# EAGLE board Mosfet2 (EAGLE 9.3.0)
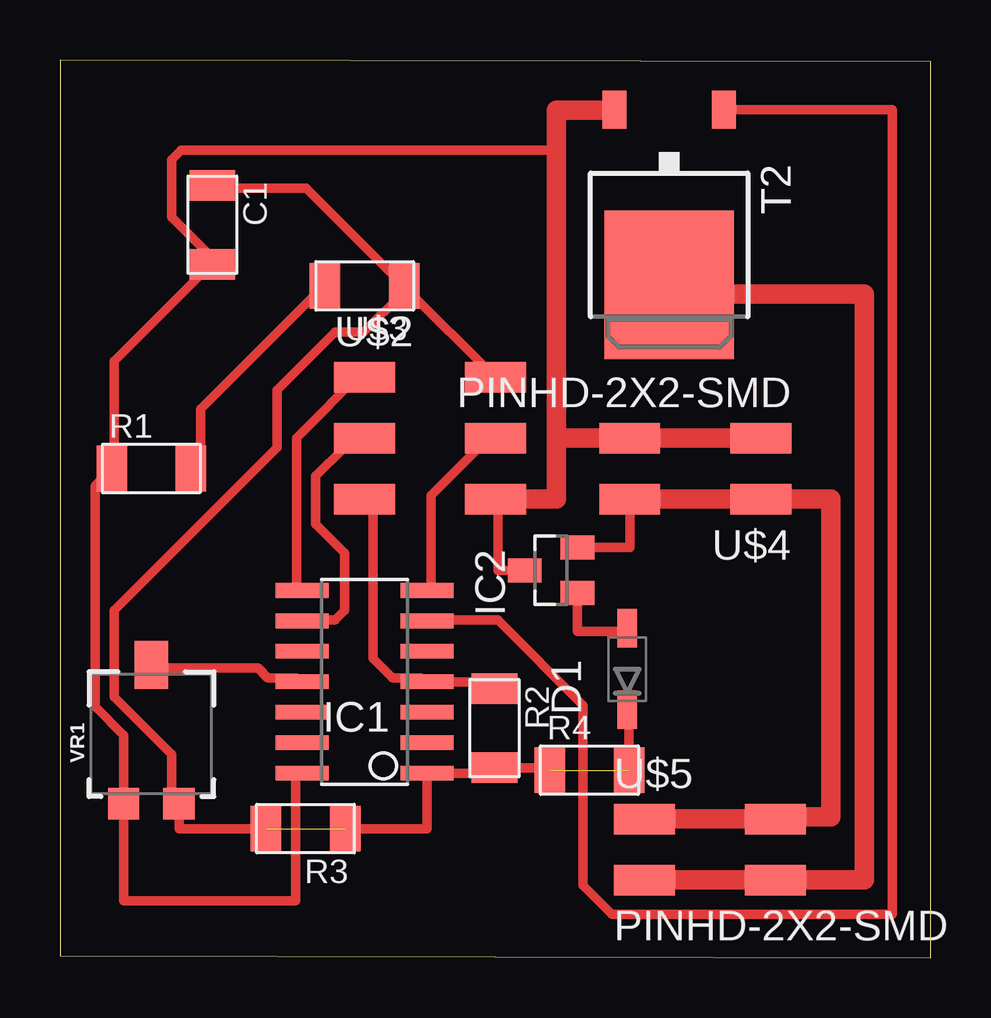
[diagram p0: board, top side]

Size 36.3 x 37.43 mm. Coordinates in mm from the lower left corner, seen from the top.
Outline: 0,0.08 36.3,0 36.3,37.35 0,37.43 0,0.08
Copper layers (1*16): Top 0.035mm / dielectric 1.5mm / Bottom 0.035mm
Design rules "default *": minimum track width 0.4mm, minimum drill 0.8mm, track to track 0.4mm, track to pad 0.4mm, pad to pad 0.4mm, via to via 0.4mm, smd to smd 0.4mm, copper to edge 40mil, drill to drill 6mil, minimum pad ring 10mil, minimum via ring 8mil, stop-mask expansion 4mil, vias tented up to drill 0mil, thermal gap 10mil

## Footprints (pad centres in the part's own frame; a part is rotated, then mirrored left to right if it is on the bottom)
C1206FAB = smd 1.27 x 1.905: 1 -1.651,0; 2 1.651,0
SOD123 = smd 1.6 x 0.8: ANODE 1.7,0; CATHODE -1.7,0
SOIC14 = smd 0.61 x 2.21: 1 -3.81,-2.603; 2 -2.54,-2.603; 3 -1.27,-2.603; 4 0,-2.603; 5 1.27,-2.603; 6 2.54,-2.603; 7 3.81,-2.603; 8 3.81,2.603; 9 2.54,2.603; 10 1.27,2.603; 11 0,2.603; 12 -1.27,2.603; 13 -2.54,2.603; 14 -3.81,2.603
SOT23 = smd 1 x 1.4: 1 -0.95,-1.1; 2 0.95,-1.1; 3 0,1.1
R1206FAB = smd 1.27 x 1.905: 1 -1.651,0; 2 1.651,0
TO252 = smd 1 x 1.6: 1 -2.28,-4.8; 2 2.28,-4.8 | smd 5.4 x 6.2: 3 0,2.5
2X03SMD = smd 2.54 x 1.27: 1 -2.54,2.54; 2 2.92,2.54; 3 -2.54,0; 4 2.92,0; 5 -2.54,-2.54; 6 2.92,-2.54
LED1206FAB = smd 1.27 x 1.905: 1 -1.651,0; 2 1.651,0
2X02SMD = smd 2.54 x 1.27: 1 -2.54,1.27; 2 2.92,1.27; 3 -2.54,-1.27; 4 2.92,-1.27
TRIMPOT-SMD-5MM = smd 1.3 x 1.3: A 1.15,-2.54; C -1.15,-2.54 | smd 1.402 x 2: B 0,3.239

## Placement (x,y rotation side)
C1  1uF  [C1206FAB]  6.35,30.56 270 top
D1  [SOD123]  23.65,12.04 90 top
IC1  ATTINY44-SSU  [SOIC14]  12.7,11.51 90 top
IC2  [SOT23]  20.47,16.15 90 top
R1  499  [R1206FAB]  3.81,20.4 0 top
R2  10K  [R1206FAB]  18.11,9.58 270 top
R3  0  [R1206FAB]  10.24,5.38 180 top
R4  0  [R1206FAB]  22.07,7.82 0 top
T2  [TO252]  25.4,30.56 180 top
U$2  AVRISPSMD  [2X03SMD]  15.24,21.67 0 top
U$3  LEDFAB1206  [LED1206FAB]  12.7,28.02 180 top
U$4  PINHD-2X2-SMD  [2X02SMD]  26.67,20.4 180 top
U$5  PINHD-2X2-SMD  [2X02SMD]  26.9,4.52 0 top
VR1  5k  [TRIMPOT-SMD-5MM]  3.81,8.97 0 top

## Library data of the parts
C1 D1 IC1 IC2 R1-R4 T2 U$2-U$5 = fab
VR1 = SparkFun-Resistors; PROD_ID: RES-11156

## Nets
0: C1.2 IC1.14 IC2.3 R1.1 T2.2 U$2.6 U$4.3 U$4.4 VR1.C
12V: IC2.2 U$4.1 U$4.2 U$5.1 U$5.2
ANALOG: IC1.11 VR1.B
MISO: IC1.8 U$2.1
MOSFET: T2.3 U$5.3 U$5.4
MOSI: IC1.7 U$2.4
MOTOR: IC1.6 T2.1
N$1: R1.2 U$3.2
N$5: IC1.5
N$6: IC1.3
N$7: IC1.2
N$11: D1.ANODE IC2.1
N$12: IC1.10
RST: IC1.4 R2.1 U$2.5
RX: IC1.12
SCK: IC1.9 U$2.3
TX: IC1.13
VCC: C1.1 D1.CATHODE IC1.1 R2.2 R3.1 R3.2 R4.1 R4.2 U$2.2 U$3.1 VR1.A

## Tracks (layer width: path | path; a pad name or v marks a point on that pad's centre or on a via)
0
  Top 0.4: 2.66,6.08 VR1.C | 9.86,7.68 IC1.14 9.83,7.7 9.83,2.39 2.66,2.39 VR1.C | VR1.C 2.66,9.28 1.46,10.48 1.46,19.68 1.86,20.08 R1.1 2.26,20.48 2.26,24.88 6.26,28.88 C1.2 6.26,29.28 4.66,30.88 4.66,33.28 5.06,33.68 20.7,33.68 20.7,34.06 | 29.46,21.68 U$4.3 29.06,21.68 | 23.06,35.28 T2.2 | U$2.6 18.26,19.28 18.26,16.15 IC2.3 | 23.86,21.68 U$4.4
  Top 0.813: 20.7,21.67 U$4.4 U$4.3 | 20.7,21.67 20.7,34.06 20.7,35.33 23.12,35.33 T2.2 | U$2.6 20.7,19.13 20.7,21.67
12V
  Top 0.4: 23.86,19.28 U$4.2 | 29.06,19.28 U$4.1 | 29.8,5.82 U$5.2 | 24.6,5.82 U$5.1 | 23.46,18.88 U$4.2 | IC2.2 23.75,17.1 U$4.2
  Top 0.813: U$4.1 32.13,19.13 32.13,5.87 29.82,5.87 U$5.2 24.6,5.79 24.6,5.82 | U$4.2 29.06,19.13 29.06,19.28
ANALOG
  Top 0.4: VR1.B 3.86,12.08 8.26,12.08 8.66,11.68 9.86,11.68 IC1.11
MISO
  Top 0.4: IC1.8 9.86,15.28 9.86,21.68 12.66,24.48 U$2.1
MOSFET
  Top 0.4: 24.6,3.42 U$5.3 | 29.8,3.42 U$5.4 30.2,3.42 | 26.26,27.68 25.46,27.68 T2.3
  Top 0.813: 25.46,27.68 33.53,27.68 33.53,3.25 U$5.4 U$5.3
MOSI
  Top 0.4: IC1.7 15.46,15.28 15.46,19.28 17.86,21.68 U$2.4
MOTOR
  Top 0.4: 27.86,35.28 T2.1 34.7,35.36 34.7,1.82 23,1.82 21.8,3.02 21.8,10.53 18.26,14.08 15.46,14.08 IC1.6
N$1
  Top 0.4: R1.2 5.86,20.48 5.86,22.88 10.66,27.68 U$3.2
N$11
  Top 0.4: IC2.1 21.57,13.61 23.65,13.61 D1.ANODE
RST
  Top 0.4: 17.75,11.28 R2.1 18.11,11.51 IC1.4 15.06,11.68 13.86,11.68 13.06,12.48 13.06,18.88 U$2.5
SCK
  Top 0.4: IC1.9 10.26,14.08 11.46,14.08 11.86,14.48 11.86,16.88 10.66,18.08 10.66,20.08 11.86,21.28 12.66,21.28 U$2.3
VCC  (2 unrouted)
  Top 0.4: U$3.1 14.26,27.68 12.66,26.08 11.46,26.08 9.06,23.68 9.06,21.28 2.26,14.48 2.26,10.88 4.66,8.48 4.66,6.48 VR1.A 4.96,5.39 R3.2 | C1.1 6.66,32.08 10.26,32.08 14.26,28.08 U$3.1 | U$2.2 17.86,24.48 14.66,27.68 U$3.1 | 17.75,8.08 R2.2 | 15.46,7.68 IC1.1 | R3.1 15.3,5.39 IC1.1 | IC1.1 18.11,7.7 R2.2 | R2.2 20.42,7.93 R4.1 | D1.CATHODE 23.72,10.34 R4.2